# Altium PCB Copy of main - shifted.PcbDoc (part 8 of 15)
Units mil, origin at the board's own origin, x right, y up, seen from the top; angles counter-clockwise.
Board outline 8394.55 x 5164.44 mil, 7 copper layers (Top Layer 1, Layer 2, Layer 3, Unused, Layer 4_pow, Layer 5_gnd, Bottom 6+gnd), stack 46.112 mil thick; 363 components, 409 nets, 1750 pads, 991 vias.
Unrouted connection lines stored in the file: 111.
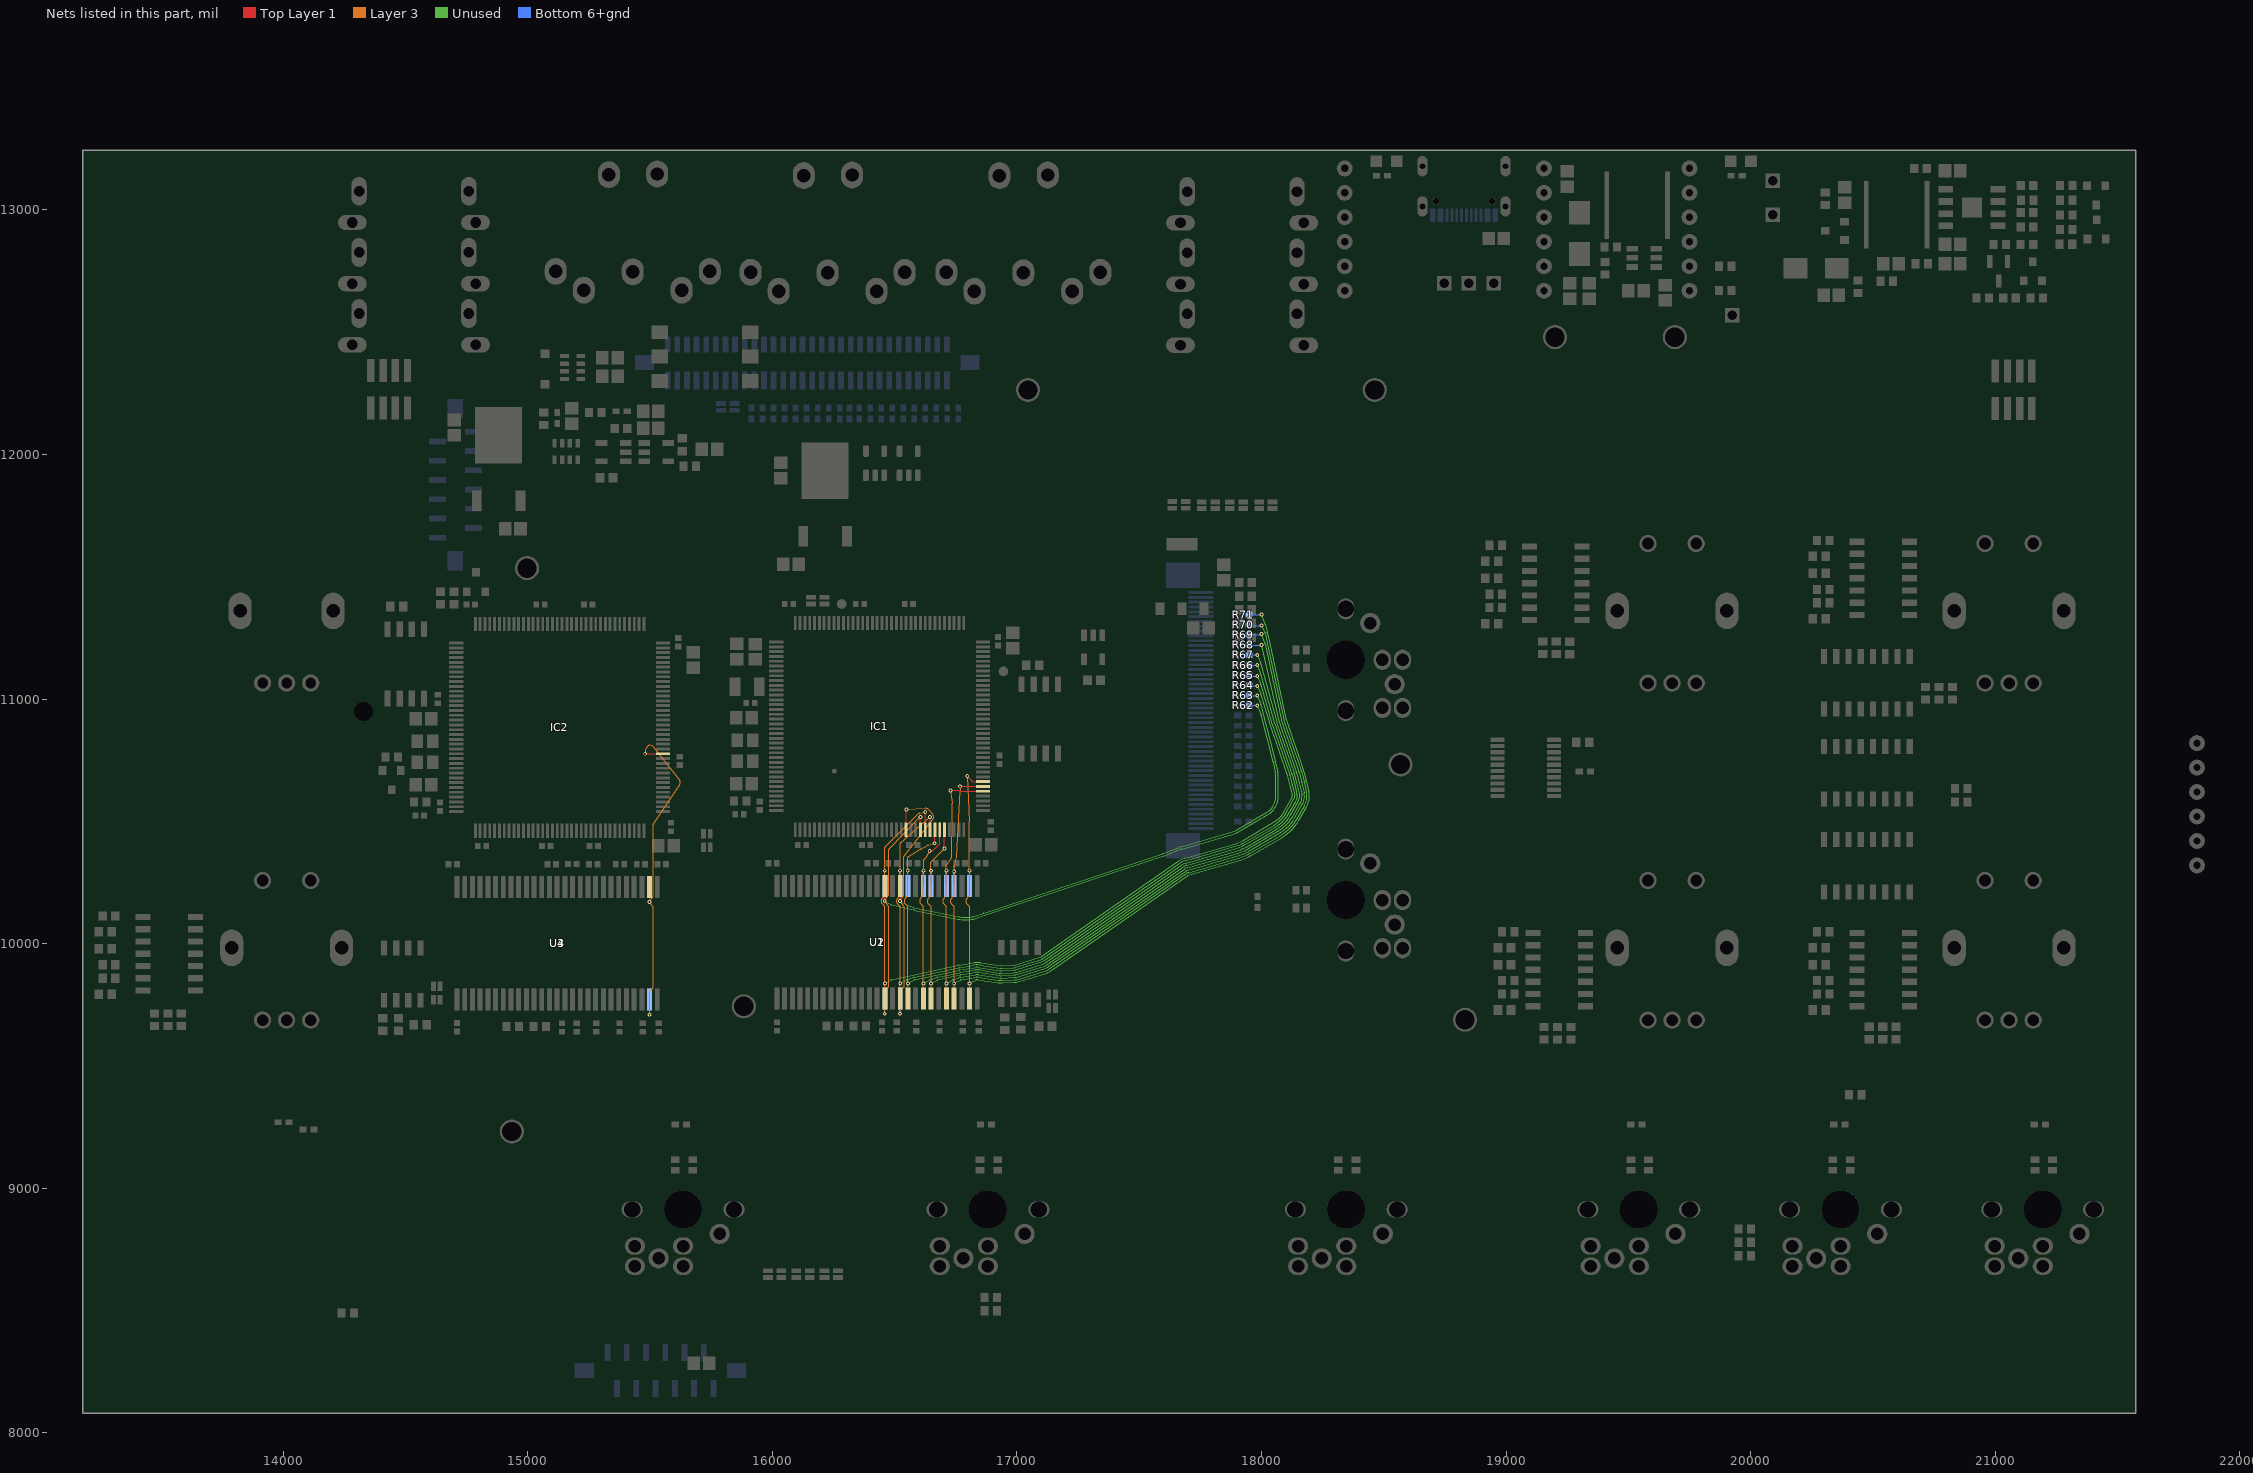
[diagram p11: the nets of this part, all layers, seen from the top]

## Via types
v1: diameter 15.75, hole 7.87, Top Layer 1 to Bottom 6+gnd, tented both sides, 923 vias
v2: diameter 27.56, hole 11.81, Top Layer 1 to Bottom 6+gnd, 45 vias
v3: diameter 23.62/23.62/23.62/23.62/23.62/23.62/23.62 (per signal layer), hole 12, Top Layer 1 to Bottom 6+gnd, tented top, 10 vias
v4: diameter 15.75, hole 7.87, Top Layer 1 to Bottom 6+gnd, 10 vias
v5: diameter 23.62/23.62/23.62/23.62/23.62/23.62/23.62 (per signal layer), hole 12, Top Layer 1 to Bottom 6+gnd, tented bottom, 3 vias

## Nets (pads, with @x,y where several pads share a name; then routed paths per layer and width w, separated by ;. In a path a pad name is that pad's centre, name@x,y a point inside that pad or via, vN(x,y) a via of type N, cw(c..) or ccw(c..) an arc to the next point about the centre after c; other vN are vias at no path point) (continued)
D6: IC1.60 R62.2 U1.11 U2.11 | length 3636.5
  Top Layer 1 w5: v1(16522.39,10174.13) 16522.39,10193.72 U1.11@16522.64,10236.22 ; IC1.60@16546.58,10465.91 16547.28,10466.61 16547.28,10547.95 v1(16548.15,10548.82)
  Unused w5: v1(16522.39,10174.13) 16523.97,10172.64 ccw(c16527.39,10176.28) 16525.08,10171.85 16546.76,10160.51 ccw(c16553.89,10174.13) 16548.12,10159.88 16576.19,10148.61 ccw(c16585.65,10172.15) 16580.53,10147.3 16761.18,10110.1 ccw(c16774.36,10174.13) 16774.36,10108.76 16805.86,10108.76 ccw(c16805.86,10174.13) 16827.38,10112.4 16862.9,10124.76 cw(c16871.26,10100.81) 16863.28,10124.89 17596.76,10367.97 ccw(c17573.21,10439.17) 17600.79,10369.43 17658.78,10392.32 cw(c17710.04,10262.58) 17671.27,10396.58 17879.91,10456.95 ccw(c17859.4,10529.09) 17897.19,10464.3 18021.56,10536.89 ccw(c17983.57,10601.98) 18058.94,10601.98 18058.94,10681.98 ccw(c17983.57,10681.98) 18057.05,10698.76 18047.32,10741.43 ccw(c17983.57,10726.98) 18046.89,10743.24 17997.35,10936.27 ccw(c17982.46,10932.45) 17996.74,10938.14 v1(17982.46,10974.03)
  Layer 3 w5: v1(16522.39,9713.5) 16522.39,9805.11 cw(c16527.39,9805.12) 16523.84,9808.63 16537.06,9821.89 ; v1(16548.15,10548.82) 16624.21,10553.92 ; 16537.06,9821.89 ccw(c16533.51,9825.42) 16538.51,9825.33 ; 16537.06,9821.89 ccw(c16533.51,9825.42) 16538.51,9825.33 ; 16537.06,9821.89 ccw(c16533.51,9825.42) 16538.51,9825.33 ; 16537.06,9821.89 ccw(c16533.51,9825.42) 16538.51,9825.33 ; 16537.06,9821.89 ccw(c16533.51,9825.42) 16538.51,9825.33 ; 16537.06,9821.89 ccw(c16533.51,9825.42) 16538.51,9825.33 ; 16537.06,9821.89 ccw(c16533.51,9825.42) 16538.51,9825.33 ; 16537.06,9821.89 ccw(c16533.51,9825.42) 16538.51,9825.33 ; 16537.06,9821.89 ccw(c16533.51,9825.42) 16538.51,9825.33 ; 16537.06,9821.89 ccw(c16533.51,9825.42) 16538.51,9825.33 ; 16537.06,9821.89 ccw(c16533.51,9825.42) 16538.51,9825.33 ; 16537.06,9821.89 ccw(c16533.51,9825.42) 16538.51,9825.33 ; 16537.06,9821.89 ccw(c16533.51,9825.42) 16538.51,9825.33 ; 16537.06,9821.89 ccw(c16533.51,9825.42) 16538.51,9825.33 ; 16537.06,9821.89 ccw(c16533.51,9825.42) 16538.51,9825.33 ; 16537.06,9821.89 ccw(c16533.51,9825.42) 16538.51,9825.33 ; 16537.46,10152.99 cw(c16533.51,10149.93) 16538.51,10150.02 ; 16537.46,10152.99 cw(c16533.51,10149.93) 16538.51,10150.02 ; 16537.46,10152.99 cw(c16533.51,10149.93) 16538.51,10150.02 ; 16537.46,10152.99 cw(c16533.51,10149.93) 16538.51,10150.02 ; 16537.46,10152.99 cw(c16533.51,10149.93) 16538.51,10150.02 ; 16537.46,10152.99 cw(c16533.51,10149.93) 16538.51,10150.02 ; 16537.46,10152.99 cw(c16533.51,10149.93) 16538.51,10150.02 ; 16537.46,10152.99 cw(c16533.51,10149.93) 16538.51,10150.02 ; 16537.46,10152.99 cw(c16533.51,10149.93) 16538.51,10150.02 ; 16537.46,10152.99 cw(c16533.51,10149.93) 16538.51,10150.02 ; 16537.46,10152.99 cw(c16533.51,10149.93) 16538.51,10150.02 ; 16537.46,10152.99 cw(c16533.51,10149.93) 16538.51,10150.02 ; 16537.46,10152.99 cw(c16533.51,10149.93) 16538.51,10150.02 ; 16537.46,10152.99 cw(c16533.51,10149.93) 16538.51,10150.02 ; 16537.46,10152.99 cw(c16533.51,10149.93) 16538.51,10150.02 ; 16537.46,10152.99 cw(c16533.51,10149.93) 16538.51,10150.02 ; 16537.47,10152.99 16523.44,10171.06 cw(c16527.39,10174.13) v1(16522.39,10174.13) 16522.39,10174.19 cw(c16527.39,10174.13) 16523.21,10176.88 16536.95,10197.79 ccw(c16532.77,10200.53) 16537.77,10200.44 16537.77,10356.36 ; 16537.77,10356.36 cw(c16542.77,10356.36) 16538.84,10359.46 ; 16537.77,10356.36 cw(c16542.77,10356.36) 16538.84,10359.46 ; 16537.77,10356.36 cw(c16542.77,10356.36) 16538.84,10359.46 ; 16537.77,10356.36 cw(c16542.77,10356.36) 16538.84,10359.46 ; 16537.77,10356.36 cw(c16542.77,10356.36) 16538.84,10359.46 ; 16537.77,10356.36 cw(c16542.77,10356.36) 16538.84,10359.46 ; 16537.77,10356.36 cw(c16542.77,10356.36) 16538.84,10359.46 ; 16537.77,10356.36 cw(c16542.77,10356.36) 16538.84,10359.46 ; 16537.77,10356.36 cw(c16542.77,10356.36) 16538.84,10359.46 ; 16537.77,10356.36 cw(c16542.77,10356.36) 16538.84,10359.46 ; 16537.77,10356.36 cw(c16542.77,10356.36) 16538.84,10359.46 ; 16537.77,10356.36 cw(c16542.77,10356.36) 16538.84,10359.46 ; 16537.77,10356.36 cw(c16542.77,10356.36) 16538.84,10359.46 ; 16537.77,10356.36 cw(c16542.77,10356.36) 16538.84,10359.46 ; 16537.77,10356.36 cw(c16542.77,10356.36) 16538.84,10359.46 ; 16537.77,10356.36 cw(c16542.77,10356.36) 16538.84,10359.46 ; 16538.51,9825.33 16538.51,10150.02 ; 16538.84,10359.46 16656.68,10509.07 ccw(c16644.61,10518.58) 16655.65,10529.28 16636.28,10549.28 ; 16624.21,10553.92 cw(c16625.24,10538.58) 16636.28,10549.28 ; 16624.21,10553.92 cw(c16625.24,10538.58) 16636.28,10549.28 ; 16624.21,10553.92 cw(c16625.24,10538.58) 16636.28,10549.28 ; 16624.21,10553.92 cw(c16625.24,10538.58) 16636.28,10549.28 ; 16624.21,10553.92 cw(c16625.24,10538.58) 16636.28,10549.28 ; 16624.21,10553.92 cw(c16625.24,10538.58) 16636.28,10549.28 ; 16624.21,10553.92 cw(c16625.24,10538.58) 16636.28,10549.28 ; 16624.21,10553.92 cw(c16625.24,10538.58) 16636.28,10549.28 ; 16624.21,10553.92 cw(c16625.24,10538.58) 16636.28,10549.28 ; 16624.21,10553.92 cw(c16625.24,10538.58) 16636.28,10549.28 ; 16624.21,10553.92 cw(c16625.24,10538.58) 16636.28,10549.28 ; 16624.21,10553.92 cw(c16625.24,10538.58) 16636.28,10549.28 ; 16624.21,10553.92 cw(c16625.24,10538.58) 16636.28,10549.28 ; 16624.21,10553.92 cw(c16625.24,10538.58) 16636.28,10549.28 ; 16624.21,10553.92 cw(c16625.24,10538.58) 16636.28,10549.28 ; 16624.21,10553.92 cw(c16625.24,10538.58) 16636.28,10549.28
  Bottom 6+gnd w5: v1@16522.64,9713.75 U2.11@16522.64,9775.59 ; R62.2@17948.43,10974.03 v1(17982.46,10974.03)
D7: IC1.63 R63.2 U1.13 U2.13 | length 3429.1
  Top Layer 1 w5: v1(16459.4,10174.13) 16459.4,10193.72 U1.13@16459.65,10236.22 ; IC1.63@16605.47,10466.06 v1@16605.47,10518.35
  Unused w5: v1(16459.4,10174.13) 16460.89,10172.65 ccw(c16464.4,10176.21) 16462.09,10171.77 16483.85,10160.47 ccw(c16490.9,10174.13) 16487.34,10159.18 16577.53,10137.72 16578.47,10137.51 ccw(c16580.53,10147.3) 16578.56,10137.5 16759.18,10100.3 ccw(c16774.36,10174.13) 16774.36,10098.76 16805.86,10098.76 ccw(c16805.86,10174.13) 16830.63,10102.95 16866.18,10115.32 cw(c16871.26,10100.81) 16866.43,10115.4 17599.95,10358.49 ccw(c17573.21,10439.17) 17604.41,10360.11 17662.5,10383.04 cw(c17710.04,10262.58) 17674.07,10386.98 17882.69,10447.34 ccw(c17859.4,10529.09) 17902.23,10455.67 18026.6,10528.25 ccw(c17983.57,10601.98) 18068.94,10601.98 18068.94,10681.98 ccw(c17983.57,10681.98) 18066.8,10700.98 18057.07,10743.66 ccw(c17983.57,10726.98) 18056.56,10745.76 17997.36,10977.83 ccw(c17982.46,10974.03) 17996.65,10979.94 v1(17982.46,11014.03)
  Layer 3 w5: v1(16459.4,9713.5) 16459.4,9805.11 cw(c16464.4,9805.12) 16460.85,9808.63 16473.81,9821.64 ; v1(16605.24,10518.58) 16476.2,10386.87 ; v1(16459.4,10174.13) ccw(c16464.4,10174.13) v1@16460.43,10171.1 ; v1(16459.4,10174.13) ccw(c16464.4,10174.13) v1@16460.43,10171.1 ; v1(16459.4,10174.13) ccw(c16464.4,10174.13) v1@16460.43,10171.1 ; v1(16459.4,10174.13) ccw(c16464.4,10174.13) v1@16460.43,10171.1 ; v1(16459.4,10174.13) ccw(c16464.4,10174.13) v1@16460.43,10171.09 ; v1(16459.4,10174.13) 16459.4,10174.19 cw(c16464.4,10174.13) 16460.22,10176.88 16473.95,10197.79 ccw(c16469.77,10200.53) 16474.77,10200.44 16474.77,10383.37 ; v1@16460.43,10171.09 16474.22,10153.24 ; 16473.81,9821.64 ccw(c16470.26,9825.17) 16475.26,9825.08 ; 16473.81,9821.64 ccw(c16470.26,9825.17) 16475.26,9825.08 ; 16473.81,9821.64 ccw(c16470.26,9825.17) 16475.26,9825.08 ; 16473.81,9821.64 ccw(c16470.26,9825.17) 16475.26,9825.08 ; 16473.81,9821.64 ccw(c16470.26,9825.17) 16475.26,9825.08 ; 16473.81,9821.64 ccw(c16470.26,9825.17) 16475.26,9825.08 ; 16473.81,9821.64 ccw(c16470.26,9825.17) 16475.26,9825.08 ; 16473.81,9821.64 ccw(c16470.26,9825.17) 16475.26,9825.08 ; 16473.81,9821.64 ccw(c16470.26,9825.17) 16475.26,9825.08 ; 16473.81,9821.64 ccw(c16470.26,9825.17) 16475.26,9825.08 ; 16473.81,9821.64 ccw(c16470.26,9825.17) 16475.26,9825.08 ; 16473.81,9821.64 ccw(c16470.26,9825.17) 16475.26,9825.08 ; 16473.81,9821.64 ccw(c16470.26,9825.17) 16475.26,9825.08 ; 16473.81,9821.64 ccw(c16470.26,9825.17) 16475.26,9825.08 ; 16473.81,9821.64 ccw(c16470.26,9825.17) 16475.26,9825.08 ; 16473.81,9821.64 ccw(c16470.26,9825.17) 16475.26,9825.08 ; 16474.22,10153.24 cw(c16470.26,10150.19) 16475.26,10150.28 ; 16474.22,10153.24 cw(c16470.26,10150.19) 16475.26,10150.28 ; 16474.22,10153.24 cw(c16470.26,10150.19) 16475.26,10150.28 ; 16474.22,10153.24 cw(c16470.26,10150.19) 16475.26,10150.28 ; 16474.22,10153.24 cw(c16470.26,10150.19) 16475.26,10150.28 ; 16474.22,10153.24 cw(c16470.26,10150.19) 16475.26,10150.28 ; 16474.22,10153.24 cw(c16470.26,10150.19) 16475.26,10150.28 ; 16474.22,10153.24 cw(c16470.26,10150.19) 16475.26,10150.28 ; 16474.22,10153.24 cw(c16470.26,10150.19) 16475.26,10150.28 ; 16474.22,10153.24 cw(c16470.26,10150.19) 16475.26,10150.28 ; 16474.22,10153.24 cw(c16470.26,10150.19) 16475.26,10150.28 ; 16474.22,10153.24 cw(c16470.26,10150.19) 16475.26,10150.28 ; 16474.22,10153.24 cw(c16470.26,10150.19) 16475.26,10150.28 ; 16474.22,10153.24 cw(c16470.26,10150.19) 16475.26,10150.28 ; 16474.22,10153.24 cw(c16470.26,10150.19) 16475.26,10150.28 ; 16474.22,10153.24 cw(c16470.26,10150.19) 16475.26,10150.28 ; 16474.77,10383.37 cw(c16479.77,10383.37) 16476.2,10386.87 ; 16474.77,10383.37 cw(c16479.77,10383.37) 16476.19,10386.86 ; 16474.77,10383.37 cw(c16479.77,10383.37) 16476.19,10386.86 ; 16474.77,10383.37 cw(c16479.77,10383.37) 16476.19,10386.86 ; 16474.77,10383.37 cw(c16479.77,10383.37) 16476.19,10386.86 ; 16474.77,10383.37 cw(c16479.77,10383.37) 16476.19,10386.86 ; 16474.77,10383.37 cw(c16479.77,10383.37) 16476.19,10386.86 ; 16474.77,10383.37 cw(c16479.77,10383.37) 16476.19,10386.86 ; 16474.77,10383.37 cw(c16479.77,10383.37) 16476.19,10386.85 ; 16474.77,10383.37 cw(c16479.77,10383.37) 16476.19,10386.85 ; 16474.77,10383.37 cw(c16479.77,10383.37) 16476.19,10386.85 ; 16474.77,10383.37 cw(c16479.77,10383.37) 16476.19,10386.85 ; 16474.77,10383.37 cw(c16479.77,10383.37) 16476.19,10386.85 ; 16474.77,10383.37 cw(c16479.77,10383.37) 16476.19,10386.85 ; 16474.77,10383.37 cw(c16479.77,10383.37) 16476.19,10386.85 ; 16474.77,10383.37 cw(c16479.77,10383.37) 16476.19,10386.85 ; 16475.26,9825.08 16475.26,10150.28
  Bottom 6+gnd w5: v1@16459.65,9713.75 U2.13@16459.65,9775.59 ; R63.2@17947.32,11014.23 17982.25,11014.23 v1(17982.46,11014.03)
D8: IC1.64 R64.2 U1.42 U2.42 | length 3696.2
  Top Layer 1 w5: U1.42@16459.65,9775.59 16459.89,9818.09 v1(16459.89,9837.68) ; IC1.64@16625.32,10465.9 v1@16625.32,10538.5
  Unused w5: v1(16459.89,9837.68) 16461.36,9839.14 cw(c16464.89,9835.6) 16462.59,9840.04 16484.28,9851.31 cw(c16491.39,9837.68) 16488.13,9852.7 16758.92,9911.35 cw(c16774.85,9837.68) 16762.89,9912.09 16824.29,9921.97 cw(c16837.84,9837.68) 16851.02,9922.03 16932.76,9909.48 ccw(c16935.11,9924.67) 16935.89,9909.31 16986.05,9911.85 ccw(c16985.24,9927.2) 16989.79,9912.52 17100.25,9946.79 ccw(c17098.03,9953.96) 17102.32,9947.81 17658.84,10335.99 cw(c17710.04,10262.58) 17685.17,10348.55 17893.88,10408.94 ccw(c17859.4,10529.09) 17922.28,10421.05 18046.76,10493.7 ccw(c17983.57,10601.98) 18092.29,10539.56 18123.88,10594.57 ccw(c18110.55,10602.23) 18125.49,10605.83 18115.75,10646.2 ccw(c18100.81,10642.59) 18115.68,10646.47 18105.48,10685.68 ccw(c18090.6,10681.8) 18105.07,10686.99 18034.86,10892.03 cw(c18141.73,10928.53) 18033.48,10896.35 17997.19,11018.41 ccw(c17982.46,11014.03) 17996.65,11019.94 v1(17982.46,11054.03)
  Layer 3 w5: v1(16459.89,9837.68) 16459.89,10149.87 ; v1(16625.24,10538.58) 16602.02,10533.62 ; 16458.43,10153.31 cw(c16454.89,10149.78) 16459.89,10149.87 ; 16458.43,10153.31 cw(c16454.89,10149.78) 16459.89,10149.87 ; 16458.43,10153.31 cw(c16454.89,10149.78) 16459.89,10149.87 ; 16458.43,10153.31 cw(c16454.89,10149.78) 16459.89,10149.87 ; 16458.43,10153.31 cw(c16454.89,10149.78) 16459.89,10149.87 ; 16458.43,10153.31 cw(c16454.89,10149.78) 16459.89,10149.87 ; 16458.43,10153.31 cw(c16454.89,10149.78) 16459.89,10149.87 ; 16458.43,10153.31 cw(c16454.89,10149.78) 16459.89,10149.87 ; 16458.43,10153.31 cw(c16454.89,10149.78) 16459.89,10149.87 ; 16458.43,10153.31 cw(c16454.89,10149.78) 16459.89,10149.87 ; 16458.43,10153.31 cw(c16454.89,10149.78) 16459.89,10149.87 ; 16458.43,10153.31 cw(c16454.89,10149.78) 16459.89,10149.87 ; 16458.43,10153.31 cw(c16454.89,10149.78) 16459.89,10149.87 ; 16458.43,10153.31 cw(c16454.89,10149.78) 16459.89,10149.87 ; 16458.43,10153.31 cw(c16454.89,10149.78) 16459.89,10149.87 ; 16458.43,10153.31 cw(c16454.89,10149.78) 16459.89,10149.87 ; 16458.43,10153.31 16448.51,10163.28 cw(c16459.4,10174.13) 16447.88,10184.31 16458.64,10196.48 ; 16458.64,10196.48 ccw(c16454.89,10199.79) 16459.89,10199.7 ; 16458.64,10196.48 ccw(c16454.89,10199.79) 16459.89,10199.7 ; 16458.64,10196.48 ccw(c16454.89,10199.79) 16459.89,10199.7 ; 16458.64,10196.48 ccw(c16454.89,10199.79) 16459.89,10199.7 ; 16458.64,10196.48 ccw(c16454.89,10199.79) 16459.89,10199.7 ; 16458.64,10196.48 ccw(c16454.89,10199.79) 16459.89,10199.7 ; 16458.64,10196.48 ccw(c16454.89,10199.79) 16459.89,10199.7 ; 16458.64,10196.48 ccw(c16454.89,10199.79) 16459.89,10199.7 ; 16458.64,10196.48 ccw(c16454.89,10199.79) 16459.89,10199.7 ; 16458.64,10196.48 ccw(c16454.89,10199.79) 16459.89,10199.7 ; 16458.64,10196.48 ccw(c16454.89,10199.79) 16459.89,10199.7 ; 16458.64,10196.48 ccw(c16454.89,10199.79) 16459.89,10199.7 ; 16458.64,10196.48 ccw(c16454.89,10199.79) 16459.89,10199.7 ; 16458.64,10196.48 ccw(c16454.89,10199.79) 16459.89,10199.7 ; 16458.64,10196.48 ccw(c16454.89,10199.79) 16459.89,10199.7 ; 16458.64,10196.48 ccw(c16454.89,10199.79) 16459.89,10199.7 ; 16459.4,10392.42 cw(c16464.4,10392.42) 16460.85,10395.93 ; 16459.4,10392.42 cw(c16464.4,10392.42) 16460.85,10395.93 ; 16459.4,10392.42 cw(c16464.4,10392.42) 16460.85,10395.93 ; 16459.4,10392.42 cw(c16464.4,10392.42) 16460.85,10395.93 ; 16459.4,10392.42 cw(c16464.4,10392.42) 16460.85,10395.93 ; 16459.4,10392.42 cw(c16464.4,10392.42) 16460.85,10395.93 ; 16459.4,10392.42 cw(c16464.4,10392.42) 16460.85,10395.93 ; 16459.4,10392.42 cw(c16464.4,10392.42) 16460.85,10395.93 ; 16459.4,10392.42 cw(c16464.4,10392.42) 16460.85,10395.93 ; 16459.4,10392.42 cw(c16464.4,10392.42) 16460.85,10395.93 ; 16459.4,10392.42 cw(c16464.4,10392.42) 16460.85,10395.93 ; 16459.4,10392.42 cw(c16464.4,10392.42) 16460.85,10395.93 ; 16459.4,10392.42 cw(c16464.4,10392.42) 16460.85,10395.93 ; 16459.4,10392.42 cw(c16464.4,10392.42) 16460.85,10395.93 ; 16459.4,10392.42 cw(c16464.4,10392.42) 16460.85,10395.93 ; 16459.4,10392.42 cw(c16464.4,10392.42) 16460.85,10395.93 ; 16459.4,10392.42 v1(16459.4,10298.31) 16459.89,10297.82 16459.89,10199.7 ; 16460.85,10395.93 16594.38,10529.47 ; 16594.38,10529.47 cw(c16605.24,10518.58) 16602.02,10533.62 ; 16594.38,10529.47 cw(c16605.24,10518.58) 16602.02,10533.62 ; 16594.38,10529.47 cw(c16605.24,10518.58) 16602.02,10533.62 ; 16594.38,10529.47 cw(c16605.24,10518.58) 16602.02,10533.62 ; 16594.38,10529.47 cw(c16605.24,10518.58) 16602.02,10533.62 ; 16594.38,10529.47 cw(c16605.24,10518.58) 16602.02,10533.62 ; 16594.38,10529.47 cw(c16605.24,10518.58) 16602.02,10533.62 ; 16594.38,10529.47 cw(c16605.24,10518.58) 16602.02,10533.62 ; 16594.38,10529.47 cw(c16605.24,10518.58) 16602.02,10533.62 ; 16594.38,10529.47 cw(c16605.24,10518.58) 16602.02,10533.62 ; 16594.38,10529.47 cw(c16605.24,10518.58) 16602.02,10533.62 ; 16594.38,10529.47 cw(c16605.24,10518.58) 16602.02,10533.62 ; 16594.38,10529.47 cw(c16605.24,10518.58) 16602.02,10533.62 ; 16594.38,10529.47 cw(c16605.24,10518.58) 16602.02,10533.62 ; 16594.38,10529.47 cw(c16605.24,10518.58) 16602.02,10533.62 ; 16594.38,10529.47 cw(c16605.24,10518.58) 16602.02,10533.62
  Bottom 6+gnd w5: U2.42@16459.65,10236.22 v1@16459.65,10298.06 ; R64.2@17947.32,11055.55 17980.94,11055.55 v1(17982.46,11054.03)
D9: IC1.65 R65.2 U1.44 U2.44 | length 3497.6
  Top Layer 1 w5: U1.44@16522.64,9775.59 16522.88,9818.09 v1(16522.88,9837.68) ; IC1.65@16644.84,10466.06 v1@16644.84,10518.35
  Unused w5: v1(16522.88,9837.68) 16524.35,9839.14 cw(c16527.88,9835.6) 16525.58,9840.04 16547.27,9851.31 cw(c16554.38,9837.68) 16549.5,9852.25 16577.84,9861.75 cw(c16585.87,9837.68) 16580.55,9862.48 16761.07,9901.58 cw(c16774.85,9837.68) 16764.46,9902.22 16825.85,9912.09 cw(c16837.84,9837.68) 16849.47,9912.15 16931.17,9899.6 ccw(c16935.11,9924.67) 16936.43,9899.33 16986.51,9901.86 ccw(c16985.24,9927.2) 16992.72,9902.96 17103.22,9937.24 ccw(c17098.03,9953.96) 17108.04,9939.6 17664.48,10327.73 cw(c17710.04,10262.58) 17688,10338.96 17896.69,10399.34 ccw(c17859.4,10529.09) 17927.32,10412.42 18051.8,10485.06 ccw(c17983.57,10601.98) 18100.97,10534.58 18132.55,10589.59 ccw(c18110.55,10602.23) 18135.22,10608.18 18125.47,10648.55 ccw(c18100.81,10642.59) 18125.36,10648.99 18115.15,10688.19 ccw(c18090.6,10681.8) 18114.53,10690.23 18044.33,10895.24 cw(c18141.73,10928.53) 18042.82,10900.04 17997.23,11058.29 ccw(c17982.46,11054.03) 17996.65,11059.94 v1(17982.46,11094.03)
  Layer 3 w5: v1(16522.88,9837.68) 16522.88,10149.87 ; v1(16644.61,10518.58) 16524.08,10412.23 ; 16521.43,10153.31 cw(c16517.88,10149.78) 16522.88,10149.87 ; 16521.43,10153.31 cw(c16517.88,10149.78) 16522.88,10149.87 ; 16521.43,10153.31 cw(c16517.88,10149.78) 16522.88,10149.87 ; 16521.43,10153.31 cw(c16517.88,10149.78) 16522.88,10149.87 ; 16521.43,10153.31 cw(c16517.88,10149.78) 16522.88,10149.87 ; 16521.43,10153.31 cw(c16517.88,10149.78) 16522.88,10149.87 ; 16521.43,10153.31 cw(c16517.88,10149.78) 16522.88,10149.87 ; 16521.43,10153.31 cw(c16517.88,10149.78) 16522.88,10149.87 ; 16521.43,10153.31 cw(c16517.88,10149.78) 16522.88,10149.87 ; 16521.43,10153.31 cw(c16517.88,10149.78) 16522.88,10149.87 ; 16521.43,10153.31 cw(c16517.88,10149.78) 16522.88,10149.87 ; 16521.43,10153.31 cw(c16517.88,10149.78) 16522.88,10149.87 ; 16521.43,10153.31 cw(c16517.88,10149.78) 16522.88,10149.87 ; 16521.43,10153.31 cw(c16517.88,10149.78) 16522.88,10149.87 ; 16521.43,10153.31 cw(c16517.88,10149.78) 16522.88,10149.87 ; 16521.43,10153.31 cw(c16517.88,10149.78) 16522.88,10149.87 ; 16521.43,10153.31 16511.5,10163.28 cw(c16522.39,10174.13) 16510.87,10184.31 16521.63,10196.48 ; 16521.63,10196.48 ccw(c16517.88,10199.79) 16522.88,10199.7 ; 16521.63,10196.48 ccw(c16517.88,10199.79) 16522.88,10199.7 ; 16521.63,10196.48 ccw(c16517.88,10199.79) 16522.88,10199.7 ; 16521.63,10196.48 ccw(c16517.88,10199.79) 16522.88,10199.7 ; 16521.63,10196.48 ccw(c16517.88,10199.79) 16522.88,10199.7 ; 16521.63,10196.48 ccw(c16517.88,10199.79) 16522.88,10199.7 ; 16521.63,10196.48 ccw(c16517.88,10199.79) 16522.88,10199.7 ; 16521.63,10196.48 ccw(c16517.88,10199.79) 16522.88,10199.7 ; 16521.63,10196.48 ccw(c16517.88,10199.79) 16522.88,10199.7 ; 16521.63,10196.48 ccw(c16517.88,10199.79) 16522.88,10199.7 ; 16521.63,10196.48 ccw(c16517.88,10199.79) 16522.88,10199.7 ; 16521.63,10196.48 ccw(c16517.88,10199.79) 16522.88,10199.7 ; 16521.63,10196.48 ccw(c16517.88,10199.79) 16522.88,10199.7 ; 16521.63,10196.48 ccw(c16517.88,10199.79) 16522.88,10199.7 ; 16521.63,10196.48 ccw(c16517.88,10199.79) 16522.88,10199.7 ; 16521.63,10196.48 ccw(c16517.88,10199.79) 16522.88,10199.7 ; 16522.39,10408.49 cw(c16527.39,10408.49) 16524.08,10412.24 ; 16522.39,10408.49 cw(c16527.39,10408.49) 16524.08,10412.24 ; 16522.39,10408.49 cw(c16527.39,10408.49) 16524.08,10412.24 ; 16522.39,10408.49 cw(c16527.39,10408.49) 16524.08,10412.24 ; 16522.39,10408.49 cw(c16527.39,10408.49) 16524.08,10412.24 ; 16522.39,10408.49 cw(c16527.39,10408.49) 16524.08,10412.24 ; 16522.39,10408.49 cw(c16527.39,10408.49) 16524.08,10412.24 ; 16522.39,10408.49 cw(c16527.39,10408.49) 16524.08,10412.24 ; 16522.39,10408.49 cw(c16527.39,10408.49) 16524.08,10412.24 ; 16522.39,10408.49 cw(c16527.39,10408.49) 16524.08,10412.24 ; 16522.39,10408.49 cw(c16527.39,10408.49) 16524.08,10412.24 ; 16522.39,10408.49 cw(c16527.39,10408.49) 16524.08,10412.24 ; 16522.39,10408.49 cw(c16527.39,10408.49) 16524.08,10412.24 ; 16522.39,10408.49 cw(c16527.39,10408.49) 16524.08,10412.24 ; 16522.39,10408.49 cw(c16527.39,10408.49) 16524.08,10412.24 ; 16522.39,10408.49 cw(c16527.39,10408.49) 16524.08,10412.24 ; 16522.39,10408.49 v1(16522.39,10298.31) 16522.88,10297.82 16522.88,10199.7
  Bottom 6+gnd w5: U2.44@16522.64,10236.22 v1@16522.64,10298.06 ; R65.2@17947.32,11096.87 17948.15,11096.69 17960.69,11094.03 v1(17982.46,11094.03)
D10: IC1.66 R66.2 U1.45 U2.45 | length 3395.8
  Top Layer 1 w5: U1.45@16554.13,9775.59 16554.38,9818.09 v1(16554.38,9837.68) ; v1(16663.51,10410.52) 16664.42,10411.44 IC1.66@16664.42,10466.15
  Unused w5: v1(16554.38,9837.68) 16555.85,9839.14 cw(c16559.38,9835.6) 16557.07,9840.04 16578.77,9851.31 cw(c16585.87,9837.68) 16582.62,9852.7 16763.13,9891.8 cw(c16774.85,9837.68) 16766.04,9892.35 16827.44,9902.22 cw(c16837.84,9837.68) 16847.68,9902.31 16929.65,9889.72 ccw(c16935.11,9924.67) 16936.94,9889.34 16987.02,9891.88 ccw(c16985.24,9927.2) 16995.73,9893.42 17106.18,9927.69 ccw(c17098.03,9953.96) 17113.78,9931.41 17670.18,10319.51 cw(c17710.04,10262.58) 17690.73,10329.34 17899.51,10389.75 ccw(c17859.4,10529.09) 17932.36,10403.78 18056.84,10476.43 ccw(c17983.57,10601.98) 18109.64,10529.6 18141.23,10584.61 ccw(c18110.55,10602.23) 18144.94,10610.53 18135.19,10650.89 ccw(c18100.81,10642.59) 18135.05,10651.46 18124.84,10690.67 ccw(c18090.6,10681.8) 18124,10693.46 18053.78,10898.5 cw(c18141.73,10928.53) 18052.29,10903.28 17997.25,11098.21 ccw(c17982.46,11094.03) 17996.91,11099.28 v1(17982.46,11139.03)
  Layer 3 w5: v1(16554.38,9837.68) 16554.38,10149.87 ; v1(16663.51,10410.52) 16636.6,10403.33 ccw(c16643.15,10378.82) 16630.48,10400.81 16605.64,10386.49 ccw(c16618.3,10364.5) 16605.11,10386.18 16555.55,10356.02 ; 16552.92,10153.31 cw(c16549.38,10149.78) 16554.38,10149.87 ; 16552.92,10153.31 cw(c16549.38,10149.78) 16554.38,10149.87 ; 16552.92,10153.31 cw(c16549.38,10149.78) 16554.38,10149.87 ; 16552.92,10153.31 cw(c16549.38,10149.78) 16554.38,10149.87 ; 16552.92,10153.31 cw(c16549.38,10149.78) 16554.38,10149.87 ; 16552.92,10153.31 cw(c16549.38,10149.78) 16554.38,10149.87 ; 16552.92,10153.31 cw(c16549.38,10149.78) 16554.38,10149.87 ; 16552.92,10153.31 cw(c16549.38,10149.78) 16554.38,10149.87 ; 16552.92,10153.31 cw(c16549.38,10149.78) 16554.38,10149.87 ; 16552.92,10153.31 cw(c16549.38,10149.78) 16554.38,10149.87 ; 16552.92,10153.31 cw(c16549.38,10149.78) 16554.38,10149.87 ; 16552.92,10153.31 cw(c16549.38,10149.78) 16554.38,10149.87 ; 16552.92,10153.31 cw(c16549.38,10149.78) 16554.38,10149.87 ; 16552.92,10153.31 cw(c16549.38,10149.78) 16554.38,10149.87 ; 16552.92,10153.31 cw(c16549.38,10149.78) 16554.38,10149.87 ; 16552.92,10153.31 cw(c16549.38,10149.78) 16554.38,10149.87 ; 16552.92,10153.31 16542.99,10163.28 cw(c16553.89,10174.13) 16542.29,10184.22 16551.92,10195.28 ccw(c16548.15,10198.56) 16553.15,10198.47 v1(16553.15,10298.82) 16553.15,10351.75 ; 16553.15,10351.75 cw(c16558.15,10351.75) 16555.55,10356.02 ; 16553.15,10351.75 cw(c16558.15,10351.75) 16555.55,10356.02 ; 16553.15,10351.75 cw(c16558.15,10351.75) 16555.55,10356.02 ; 16553.15,10351.75 cw(c16558.15,10351.75) 16555.55,10356.02 ; 16553.15,10351.75 cw(c16558.15,10351.75) 16555.55,10356.02 ; 16553.15,10351.75 cw(c16558.15,10351.75) 16555.55,10356.02 ; 16553.15,10351.75 cw(c16558.15,10351.75) 16555.55,10356.02 ; 16553.15,10351.75 cw(c16558.15,10351.75) 16555.55,10356.02 ; 16553.15,10351.75 cw(c16558.15,10351.75) 16555.55,10356.02 ; 16553.15,10351.75 cw(c16558.15,10351.75) 16555.55,10356.02 ; 16553.15,10351.75 cw(c16558.15,10351.75) 16555.55,10356.02 ; 16553.15,10351.75 cw(c16558.15,10351.75) 16555.55,10356.02 ; 16553.15,10351.75 cw(c16558.15,10351.75) 16555.55,10356.02 ; 16553.15,10351.75 cw(c16558.15,10351.75) 16555.55,10356.02 ; 16553.15,10351.75 cw(c16558.15,10351.75) 16555.55,10356.02 ; 16553.15,10351.75 cw(c16558.15,10351.75) 16555.55,10356.02
  Bottom 6+gnd w5: v1(16553.15,10298.82) 16553.15,10237.2 U2.45@16554.13,10236.22 ; R66.2@17947.32,11138.18 17948.43,11138.18 17981.61,11138.18 v1(17982.46,11139.03)
D11: IC1.67 R67.2 U1.47 U2.47 | length 3725.4
  Top Layer 1 w5: U1.47@16617.13,9775.59 16617.37,9818.09 v1(16617.37,9837.68) ; v1(16643.15,10378.82) 16653.55,10378.82 16684.21,10409.48 IC1.67@16684.21,10466.06
  Unused w5: v1(16617.37,9837.68) 16618.84,9839.14 cw(c16622.37,9835.6) 16620.07,9840.04 16641.76,9851.31 cw(c16648.87,9837.68) 16643.99,9852.26 16672.31,9861.74 cw(c16680.36,9837.68) 16675.04,9862.48 16765.25,9882.02 cw(c16774.85,9837.68) 16767.65,9882.48 16829.02,9892.34 cw(c16837.84,9837.68) 16846.13,9892.43 16928.12,9879.84 ccw(c16935.11,9924.67) 16937.4,9879.35 16987.49,9881.89 ccw(c16985.24,9927.2) 16998.61,9883.85 17109.14,9918.14 ccw(c17098.03,9953.96) 17119.43,9923.16 17675.87,10311.29 cw(c17710.04,10262.58) 17693.51,10319.73 17902.31,10380.15 ccw(c17859.4,10529.09) 17937.38,10395.13 18061.88,10467.79 ccw(c17983.57,10601.98) 18118.33,10524.65 18149.88,10579.6 ccw(c18110.55,10602.23) 18154.66,10612.87 18144.91,10653.24 ccw(c18100.81,10642.59) 18144.73,10653.98 18134.52,10693.19 ccw(c18090.6,10681.8) 18133.46,10696.69 18063.26,10901.68 cw(c18141.73,10928.53) 18061.72,10906.72 17997.29,11143.07 ccw(c17982.46,11139.03) 17996.74,11144.72 v1(17982.46,11180.61)
  Layer 3 w5: v1(16617.37,9837.68) 16617.37,10149.87 ; 16631.93,10357.37 v1(16643.15,10378.82) ; 16603.9,10182.37 ccw(c16616.88,10174.13) 16606.03,10163.24 ; 16603.9,10182.37 ccw(c16616.88,10174.13) 16606.03,10163.24 ; 16603.9,10182.37 ccw(c16616.88,10174.13) 16606.03,10163.24 ; 16603.9,10182.37 ccw(c16616.88,10174.13) 16606.03,10163.24 ; 16603.9,10182.37 ccw(c16616.88,10174.13) 16606.03,10163.24 ; 16603.9,10182.37 ccw(c16616.88,10174.13) 16606.03,10163.24 ; 16603.9,10182.37 ccw(c16616.88,10174.13) 16606.03,10163.24 ; 16603.9,10182.37 ccw(c16616.88,10174.13) 16606.03,10163.24 ; 16603.9,10182.37 ccw(c16616.88,10174.13) 16606.03,10163.24 ; 16603.9,10182.37 ccw(c16616.88,10174.13) 16606.03,10163.24 ; 16603.9,10182.37 ccw(c16616.88,10174.13) 16606.03,10163.24 ; 16603.9,10182.37 ccw(c16616.88,10174.13) 16606.03,10163.24 ; 16603.9,10182.37 ccw(c16616.88,10174.13) 16606.03,10163.24 ; 16603.9,10182.37 ccw(c16616.88,10174.13) 16606.03,10163.24 ; 16603.9,10182.37 ccw(c16616.88,10174.13) 16606.03,10163.24 ; 16603.9,10182.37 ccw(c16616.88,10174.13) 16606.03,10163.24 ; 16603.9,10182.37 16616.6,10202.39 ; 16606.03,10163.24 16615.92,10153.31 ; 16615.92,10153.31 cw(c16612.37,10149.78) 16617.37,10149.87 ; 16615.92,10153.31 cw(c16612.37,10149.78) 16617.37,10149.87 ; 16615.92,10153.31 cw(c16612.37,10149.78) 16617.37,10149.87 ; 16615.92,10153.31 cw(c16612.37,10149.78) 16617.37,10149.87 ; 16615.92,10153.31 cw(c16612.37,10149.78) 16617.37,10149.87 ; 16615.92,10153.31 cw(c16612.37,10149.78) 16617.37,10149.87 ; 16615.92,10153.31 cw(c16612.37,10149.78) 16617.37,10149.87 ; 16615.92,10153.31 cw(c16612.37,10149.78) 16617.37,10149.87 ; 16615.92,10153.31 cw(c16612.37,10149.78) 16617.37,10149.87 ; 16615.92,10153.31 cw(c16612.37,10149.78) 16617.37,10149.87 ; 16615.92,10153.31 cw(c16612.37,10149.78) 16617.37,10149.87 ; 16615.92,10153.31 cw(c16612.37,10149.78) 16617.37,10149.87 ; 16615.92,10153.31 cw(c16612.37,10149.78) 16617.37,10149.87 ; 16615.92,10153.31 cw(c16612.37,10149.78) 16617.37,10149.87 ; 16615.92,10153.31 cw(c16612.37,10149.78) 16617.37,10149.87 ; 16615.92,10153.31 cw(c16612.37,10149.78) 16617.37,10149.87 ; 16616.59,10202.39 ccw(c16612.37,10205.07) 16617.37,10204.98 ; 16616.59,10202.39 ccw(c16612.37,10205.07) 16617.37,10204.98 ; 16616.59,10202.39 ccw(c16612.37,10205.07) 16617.37,10204.98 ; 16616.59,10202.39 ccw(c16612.37,10205.07) 16617.37,10204.98 ; 16616.59,10202.39 ccw(c16612.37,10205.07) 16617.37,10204.98 ; 16617.37,10204.98 16617.37,10297.78 v1(16617.88,10298.28) 16617.88,10340.27 ; 16617.88,10340.27 cw(c16622.88,10340.27) 16619.32,10343.78 ; 16617.88,10340.27 cw(c16622.88,10340.27) 16619.32,10343.78 ; 16617.88,10340.27 cw(c16622.88,10340.27) 16619.32,10343.78 ; 16617.88,10340.27 cw(c16622.88,10340.27) 16619.32,10343.78 ; 16617.88,10340.27 cw(c16622.88,10340.27) 16619.32,10343.78 ; 16617.88,10340.27 cw(c16622.88,10340.27) 16619.32,10343.78 ; 16617.88,10340.27 cw(c16622.88,10340.27) 16619.32,10343.78 ; 16617.88,10340.27 cw(c16622.88,10340.27) 16619.32,10343.78 ; 16617.88,10340.27 cw(c16622.88,10340.27) 16619.32,10343.78 ; 16617.88,10340.27 cw(c16622.88,10340.27) 16619.32,10343.78 ; 16617.88,10340.27 cw(c16622.88,10340.27) 16619.32,10343.78 ; 16617.88,10340.27 cw(c16622.88,10340.27) 16619.32,10343.78 ; 16617.88,10340.27 cw(c16622.88,10340.27) 16619.32,10343.78 ; 16617.88,10340.27 cw(c16622.88,10340.27) 16619.32,10343.78 ; 16617.88,10340.27 cw(c16622.88,10340.27) 16619.32,10343.78 ; 16617.88,10340.27 cw(c16622.88,10340.27) 16619.32,10343.78 ; 16619.32,10343.78 16629.19,10353.65 ; 16629.19,10353.65 ccw(c16618.3,10364.5) 16631.92,10357.37 ; 16629.19,10353.65 ccw(c16618.3,10364.5) 16631.92,10357.37 ; 16629.19,10353.65 ccw(c16618.3,10364.5) 16631.92,10357.37 ; 16629.19,10353.65 ccw(c16618.3,10364.5) 16631.92,10357.37 ; 16629.19,10353.65 ccw(c16618.3,10364.5) 16631.92,10357.37 ; 16629.19,10353.65 ccw(c16618.3,10364.5) 16631.92,10357.37 ; 16629.19,10353.65 ccw(c16618.3,10364.5) 16631.92,10357.37 ; 16629.19,10353.65 ccw(c16618.3,10364.5) 16631.92,10357.37 ; 16629.19,10353.65 ccw(c16618.3,10364.5) 16631.92,10357.37 ; 16629.19,10353.65 ccw(c16618.3,10364.5) 16631.92,10357.37 ; 16629.19,10353.65 ccw(c16618.3,10364.5) 16631.92,10357.37 ; 16629.19,10353.65 ccw(c16618.3,10364.5) 16631.92,10357.37 ; 16629.19,10353.65 ccw(c16618.3,10364.5) 16631.92,10357.37 ; 16629.19,10353.65 ccw(c16618.3,10364.5) 16631.92,10357.37 ; 16629.19,10353.65 ccw(c16618.3,10364.5) 16631.92,10357.37 ; 16629.19,10353.65 ccw(c16618.3,10364.5) 16631.92,10357.37
  Bottom 6+gnd w5: U2.47@16617.13,10236.22 16617.88,10236.97 v1(16617.88,10298.28) ; R67.2@17948.43,11180.61 v1(17982.46,11180.61)
D12: IC1.68 R68.2 U1.48 U2.48 | length 3532
  Top Layer 1 w5: U1.48@16648.62,9775.59 16648.87,9818.09 v1(16648.87,9837.68) ; v1(16703.15,10388.82) 16703.52,10389.19 16703.52,10465.37 IC1.68@16703.78,10465.63
  Unused w5: v1(16648.87,9837.68) 16650.61,9839.19 cw(c16653.87,9835.4) 16651.55,9839.83 16673.14,9851.25 16673.25,9851.31 cw(c16680.36,9837.68) 16677.11,9852.7 16767.33,9872.24 cw(c16774.85,9837.68) 16769.24,9872.6 16830.64,9882.48 cw(c16837.84,9837.68) 16844.77,9882.52 16926.6,9869.95 ccw(c16935.11,9924.67) 16937.91,9869.37 16988,9871.9 ccw(c16985.24,9927.2) 17001.6,9874.31 17112.11,9908.59 ccw(c17098.03,9953.96) 17125.18,9914.98 17681.58,10303.07 cw(c17710.04,10262.58) 17696.28,10310.13 17905.13,10370.55 ccw(c17859.4,10529.09) 17942.42,10386.5 18066.92,10459.15 ccw(c17983.57,10601.98) 18127.01,10519.68 18158.55,10574.61 ccw(c18110.55,10602.23) 18164.38,10615.22 18154.63,10655.59 ccw(c18100.81,10642.59) 18154.41,10656.5 18144.19,10695.75 ccw(c18090.6,10681.8) 18142.92,10699.92 18072.71,10904.95 cw(c18141.73,10928.53) 18070.66,10912.15 v1(17999.57,11220.71)
  Layer 3 w5: v1(16648.87,9837.68) 16648.87,10149.83 ; v1(16703.15,10388.82) 16649.82,10335.49 ; 16636.86,10184.32 ccw(c16648.38,10174.13) 16637.5,10163.26 ; 16636.86,10184.32 ccw(c16648.38,10174.13) 16637.5,10163.26 ; 16636.86,10184.32 ccw(c16648.38,10174.13) 16637.51,10163.26 ; 16636.86,10184.32 ccw(c16648.38,10174.13) 16637.51,10163.26 ; 16636.86,10184.32 ccw(c16648.38,10174.13) 16637.51,10163.26 ; 16636.86,10184.32 ccw(c16648.38,10174.13) 16637.51,10163.26 ; 16636.86,10184.32 16647.61,10196.48 ; 16637.51,10163.26 16647.4,10153.36 ; 16647.4,10153.36 cw(c16643.87,10149.83) 16648.87,10149.86 ; 16647.4,10153.36 cw(c16643.87,10149.83) 16648.87,10149.86 ; 16647.4,10153.36 cw(c16643.87,10149.83) 16648.87,10149.86 ; 16647.4,10153.36 cw(c16643.87,10149.83) 16648.87,10149.86 ; 16647.4,10153.36 cw(c16643.87,10149.83) 16648.87,10149.86 ; 16647.4,10153.36 cw(c16643.87,10149.83) 16648.87,10149.86 ; 16647.4,10153.36 cw(c16643.87,10149.83) 16648.87,10149.86 ; 16647.4,10153.36 cw(c16643.87,10149.83) 16648.87,10149.86 ; 16647.4,10153.36 cw(c16643.87,10149.83) 16648.87,10149.86 ; 16647.4,10153.36 cw(c16643.87,10149.83) 16648.87,10149.86 ; 16647.4,10153.36 cw(c16643.87,10149.83) 16648.87,10149.86 ; 16647.4,10153.36 cw(c16643.87,10149.83) 16648.87,10149.86 ; 16647.4,10153.36 cw(c16643.87,10149.83) 16648.87,10149.86 ; 16647.4,10153.36 cw(c16643.87,10149.83) 16648.87,10149.86 ; 16647.4,10153.36 cw(c16643.87,10149.83) 16648.87,10149.86 ; 16647.4,10153.36 cw(c16643.87,10149.83) 16648.87,10149.86 ; 16647.61,10196.48 ccw(c16643.87,10199.79) 16648.87,10199.7 ; 16647.61,10196.48 ccw(c16643.87,10199.79) 16648.87,10199.7 ; 16647.61,10196.48 ccw(c16643.87,10199.79) 16648.87,10199.7 ; 16647.61,10196.48 ccw(c16643.87,10199.79) 16648.87,10199.7 ; 16647.61,10196.48 ccw(c16643.87,10199.79) 16648.87,10199.7 ; 16647.61,10196.48 ccw(c16643.87,10199.79) 16648.87,10199.7 ; 16647.61,10196.48 ccw(c16643.87,10199.79) 16648.87,10199.7 ; 16647.61,10196.48 ccw(c16643.87,10199.79) 16648.87,10199.7 ; 16647.61,10196.48 ccw(c16643.87,10199.79) 16648.87,10199.7 ; 16647.61,10196.48 ccw(c16643.87,10199.79) 16648.87,10199.7 ; 16647.61,10196.48 ccw(c16643.87,10199.79) 16648.87,10199.7 ; 16647.61,10196.48 ccw(c16643.87,10199.79) 16648.87,10199.7 ; 16647.61,10196.48 ccw(c16643.87,10199.79) 16648.87,10199.7 ; 16647.61,10196.48 ccw(c16643.87,10199.79) 16648.87,10199.7 ; 16647.61,10196.48 ccw(c16643.87,10199.79) 16648.87,10199.7 ; 16647.61,10196.48 ccw(c16643.87,10199.79) 16648.87,10199.7 ; 16648.38,10331.97 cw(c16653.38,10331.97) 16649.82,10335.49 ; 16648.38,10331.97 cw(c16653.38,10331.97) 16649.82,10335.49 ; 16648.38,10331.97 cw(c16653.38,10331.97) 16649.82,10335.49 ; 16648.38,10331.97 cw(c16653.38,10331.97) 16649.82,10335.49 ; 16648.38,10331.97 cw(c16653.38,10331.97) 16649.82,10335.49 ; 16648.38,10331.97 cw(c16653.38,10331.97) 16649.82,10335.49 ; 16648.38,10331.97 cw(c16653.38,10331.97) 16649.82,10335.49 ; 16648.38,10331.97 cw(c16653.38,10331.97) 16649.82,10335.49 ; 16648.38,10331.97 cw(c16653.38,10331.97) 16649.82,10335.49 ; 16648.38,10331.97 cw(c16653.38,10331.97) 16649.82,10335.49 ; 16648.38,10331.97 cw(c16653.38,10331.97) 16649.82,10335.49 ; 16648.38,10331.97 cw(c16653.38,10331.97) 16649.82,10335.49 ; 16648.38,10331.97 cw(c16653.38,10331.97) 16649.82,10335.49 ; 16648.38,10331.97 cw(c16653.38,10331.97) 16649.82,10335.49 ; 16648.38,10331.97 cw(c16653.38,10331.97) 16649.82,10335.49 ; 16648.38,10331.97 cw(c16653.38,10331.97) 16649.82,10335.49 ; 16648.38,10331.97 16648.38,10298.31 v1(16648.63,10298.06) 16648.87,10297.82 16648.87,10199.7
  Bottom 6+gnd w5: U2.48@16648.62,10236.22 v1(16648.63,10298.06) ; R68.2@17947.32,11220.81 17948.42,11220.8 17960.69,11220.71 v1(17999.57,11220.71)
D13: IC1.77 R69.2 U1.50 U2.50 | length 3878.8
  Top Layer 1 w5: U1.50@16711.86,9775.83 16711.86,9818.09 v1(16711.86,9837.68) ; v1(16727.71,10626.89) 16761.65,10626.89 16765.47,10623.07 IC1.77@16860.91,10623.07
  Unused w5: v1(16711.86,9837.68) 16713.41,9839.16 cw(c16716.86,9835.53) 16714.54,9839.96 16736.27,9851.32 cw(c16743.36,9837.68) 16738.48,9852.25 16766.8,9861.74 cw(c16774.85,9837.68) 16770.85,9862.73 16832.23,9872.6 cw(c16837.84,9837.68) 16843.28,9872.63 16925.1,9860.07 ccw(c16935.11,9924.67) 16938.41,9859.38 16988.5,9861.91 ccw(c16985.24,9927.2) 17004.57,9864.75 17115.07,9899.04 ccw(c17098.03,9953.96) 17130.9,9906.78 17687.29,10294.87 cw(c17710.04,10262.58) 17699.06,10300.52 17907.95,10360.96 ccw(c17859.4,10529.09) 17947.46,10377.86 18071.96,10450.52 ccw(c17983.57,10601.98) 18135.65,10514.66 18167.22,10569.63 ccw(c18110.55,10602.23) 18174.1,10617.57 18164.37,10657.89 ccw(c18100.81,10642.59) 18164.08,10659.04 18153.86,10698.27 ccw(c18090.6,10681.8) 18152.39,10703.14 18082.18,10908.16 cw(c18141.73,10928.53) 18080.17,10915.44 18014.62,11223.83 ccw(c17999.57,11220.71) 18014.02,11225.96 v1(17999.57,11265.71)
  Layer 3 w5: 16700.47,10163.29 cw(c16711.37,10174.13) 16699.85,10184.31 16710.61,10196.48 ; 16700.48,10163.28 16710.4,10153.31 ; v1(16711.86,9837.68) 16711.86,10149.87 ; v1(16727.71,10626.89) 16731.7,10602.04 ; 16731.7,10602 16735.97,10574.16 ; 16735.61,10516.87 16733.52,10358.62 ; 16735.61,10516.89 16736.26,10570 ; 16710.4,10153.31 cw(c16706.86,10149.78) 16711.86,10149.87 ; 16710.4,10153.31 cw(c16706.86,10149.78) 16711.86,10149.87 ; 16710.4,10153.31 cw(c16706.86,10149.78) 16711.86,10149.87 ; 16710.4,10153.31 cw(c16706.86,10149.78) 16711.86,10149.87 ; 16710.4,10153.31 cw(c16706.86,10149.78) 16711.86,10149.87 ; 16710.4,10153.31 cw(c16706.86,10149.78) 16711.86,10149.87 ; 16710.4,10153.31 cw(c16706.86,10149.78) 16711.86,10149.87 ; 16710.4,10153.31 cw(c16706.86,10149.78) 16711.86,10149.87 ; 16710.4,10153.31 cw(c16706.86,10149.78) 16711.86,10149.87 ; 16710.4,10153.31 cw(c16706.86,10149.78) 16711.86,10149.87 ; 16710.4,10153.31 cw(c16706.86,10149.78) 16711.86,10149.87 ; 16710.4,10153.31 cw(c16706.86,10149.78) 16711.86,10149.87 ; 16710.4,10153.31 cw(c16706.86,10149.78) 16711.86,10149.87 ; 16710.4,10153.31 cw(c16706.86,10149.78) 16711.86,10149.87 ; 16710.4,10153.31 cw(c16706.86,10149.78) 16711.86,10149.87 ; 16710.4,10153.31 cw(c16706.86,10149.78) 16711.86,10149.87 ; 16710.61,10196.48 ccw(c16706.86,10199.79) 16711.86,10199.7 ; 16710.61,10196.48 ccw(c16706.86,10199.79) 16711.86,10199.7 ; 16710.61,10196.48 ccw(c16706.86,10199.79) 16711.86,10199.7 ; 16710.61,10196.48 ccw(c16706.86,10199.79) 16711.86,10199.7 ; 16710.61,10196.48 ccw(c16706.86,10199.79) 16711.86,10199.7 ; 16710.61,10196.48 ccw(c16706.86,10199.79) 16711.86,10199.7 ; 16710.61,10196.48 ccw(c16706.86,10199.79) 16711.86,10199.7 ; 16710.61,10196.48 ccw(c16706.86,10199.79) 16711.86,10199.7 ; 16710.61,10196.48 ccw(c16706.86,10199.79) 16711.86,10199.7 ; 16710.61,10196.48 ccw(c16706.86,10199.79) 16711.86,10199.7 ; 16710.61,10196.48 ccw(c16706.86,10199.79) 16711.86,10199.7 ; 16710.61,10196.48 ccw(c16706.86,10199.79) 16711.86,10199.7 ; 16710.61,10196.48 ccw(c16706.86,10199.79) 16711.86,10199.7 ; 16710.61,10196.48 ccw(c16706.86,10199.79) 16711.86,10199.7 ; 16710.61,10196.48 ccw(c16706.86,10199.79) 16711.86,10199.7 ; 16710.61,10196.48 ccw(c16706.86,10199.79) 16711.86,10199.7 ; 16711.37,10319.97 cw(c16716.37,10319.97) 16712.24,10322.78 ; 16711.37,10319.97 cw(c16716.37,10319.97) 16712.24,10322.78 ; 16711.37,10319.97 cw(c16716.37,10319.97) 16712.24,10322.78 ; 16711.37,10319.97 cw(c16716.37,10319.97) 16712.24,10322.78 ; 16711.37,10319.97 cw(c16716.37,10319.97) 16712.24,10322.78 ; 16711.37,10319.97 cw(c16716.37,10319.97) 16712.24,10322.78 ; 16711.37,10319.97 cw(c16716.37,10319.97) 16712.24,10322.78 ; 16711.37,10319.97 cw(c16716.37,10319.97) 16712.24,10322.78 ; 16711.37,10319.97 cw(c16716.37,10319.97) 16712.24,10322.78 ; 16711.37,10319.97 cw(c16716.37,10319.97) 16712.24,10322.78 ; 16711.37,10319.97 cw(c16716.37,10319.97) 16712.24,10322.78 ; 16711.37,10319.97 cw(c16716.37,10319.97) 16712.24,10322.78 ; 16711.37,10319.97 cw(c16716.37,10319.97) 16712.24,10322.78 ; 16711.37,10319.97 cw(c16716.37,10319.97) 16712.24,10322.78 ; 16711.37,10319.97 cw(c16716.37,10319.97) 16712.24,10322.78 ; 16711.37,10319.97 cw(c16716.37,10319.97) 16712.24,10322.78 ; 16711.37,10319.97 v1(16711.37,10298.31) 16711.86,10297.82 16711.86,10199.7 ; 16712.24,10322.78 16730.86,10350.17 ; 16730.86,10350.17 ccw(c16718.15,10358.82) 16733.52,10358.62 ; 16730.86,10350.17 ccw(c16718.15,10358.82) 16733.52,10358.62 ; 16730.86,10350.17 ccw(c16718.15,10358.82) 16733.52,10358.62 ; 16730.86,10350.17 ccw(c16718.15,10358.82) 16733.52,10358.62 ; 16730.86,10350.17 ccw(c16718.15,10358.82) 16733.52,10358.62 ; 16730.86,10350.17 ccw(c16718.15,10358.82) 16733.52,10358.62 ; 16730.86,10350.17 ccw(c16718.15,10358.82) 16733.52,10358.62 ; 16730.86,10350.17 ccw(c16718.15,10358.82) 16733.52,10358.62 ; 16730.86,10350.17 ccw(c16718.15,10358.82) 16733.52,10358.62 ; 16730.86,10350.17 ccw(c16718.15,10358.82) 16733.52,10358.62 ; 16730.86,10350.17 ccw(c16718.15,10358.82) 16733.52,10358.62 ; 16730.86,10350.17 ccw(c16718.15,10358.82) 16733.52,10358.62 ; 16730.86,10350.17 ccw(c16718.15,10358.82) 16733.52,10358.62 ; 16730.86,10350.17 ccw(c16718.15,10358.82) 16733.52,10358.62 ; 16730.86,10350.17 ccw(c16718.15,10358.82) 16733.52,10358.62 ; 16730.86,10350.17 ccw(c16718.15,10358.82) 16733.52,10358.62 ; 16735.97,10574.16 cw(c16710.89,10570.31) 16736.26,10570 ; 16735.97,10574.16 cw(c16710.89,10570.31) 16736.26,10570 ; 16735.97,10574.16 cw(c16710.89,10570.31) 16736.26,10570 ; 16735.97,10574.16 cw(c16710.89,10570.31) 16736.26,10570 ; 16735.97,10574.16 cw(c16710.89,10570.31) 16736.26,10570 ; 16735.97,10574.16 cw(c16710.89,10570.31) 16736.26,10570 ; 16735.97,10574.16 cw(c16710.89,10570.31) 16736.26,10570 ; 16735.97,10574.16 cw(c16710.89,10570.31) 16736.26,10570 ; 16735.97,10574.16 cw(c16710.89,10570.31) 16736.26,10570 ; 16735.97,10574.16 cw(c16710.89,10570.31) 16736.26,10570 ; 16735.97,10574.16 cw(c16710.89,10570.31) 16736.26,10570 ; 16735.97,10574.16 cw(c16710.89,10570.31) 16736.26,10570 ; 16735.97,10574.16 cw(c16710.89,10570.31) 16736.26,10570 ; 16735.97,10574.16 cw(c16710.89,10570.31) 16736.26,10570 ; 16735.97,10574.16 cw(c16710.89,10570.31) 16736.26,10570 ; 16735.97,10574.16 cw(c16710.89,10570.31) 16736.26,10570
  Bottom 6+gnd w5: U2.50@16711.61,10236.22 v1@16711.61,10298.06 ; R69.2@17947.32,11262.13 17993.08,11262.13 17996.66,11265.71 v1(17999.57,11265.71)
D14: IC1.78 R70.2 U1.51 U2.51 | length 3508.4
  Top Layer 1 w5: U1.51@16743.36,9775.83 v1(16743.36,9837.68) ; v1(16767.21,10643.47) 16767.57,10643.11 16834.37,10643.11 16834.37,10643.46 IC1.78@16860.75,10642.6
  Unused w5: v1(16743.36,9837.68) 16744.91,9839.16 cw(c16748.36,9835.53) 16746.04,9839.96 16767.76,9851.31 cw(c16774.85,9837.68) 16772.47,9852.87 16833.82,9862.73 cw(c16837.84,9837.68) 16841.77,9862.74 16923.61,9850.18 ccw(c16935.11,9924.67) 16938.92,9849.39 16989.04,9851.93 ccw(c16985.24,9927.2) 17007.53,9855.2 17118.03,9889.49 ccw(c17098.03,9953.96) 17136.62,9898.57 17693.01,10286.67 cw(c17710.04,10262.58) 17701.84,10290.92 17910.77,10351.36 ccw(c17859.4,10529.09) 17952.5,10369.22 18077,10441.88 ccw(c17983.57,10601.98) 18144.33,10509.68 18175.89,10564.65 ccw(c18110.55,10602.23) 18183.82,10619.91 18174.09,10660.23 ccw(c18100.81,10642.59) 18173.76,10661.54 18163.54,10700.79 ccw(c18090.6,10681.8) 18161.87,10706.33 18091.65,10911.38 cw(c18141.73,10928.53) 18089.95,10917.52 18024.4,11225.93 ccw(c17999.57,11220.71) 18024.31,11226.35 18014.56,11269.13 ccw(c17999.57,11265.71) 18013.38,11272.46 v1(17999.57,11300.71)
  Layer 3 w5: v1(16743.36,9837.68) 16743.36,10149.87 ccw(c16738.36,10149.78) 16741.9,10153.31 16731.97,10163.28 cw(c16742.87,10174.13) 16731.34,10184.31 16742.1,10196.48 ccw(c16738.36,10199.79) 16743.36,10199.7 v1(16743.36,10294.41) 16743.36,10315.33 cw(c16748.36,10315.33) 16743.52,10316.61 16752.33,10349.72 ccw(c16718.15,10358.82) 16753.46,10356.77 16769.03,10625.55 16769.03,10625.6 ccw(c16764.03,10625.81) 16769,10626.34 v1(16767.21,10643.47)
  Bottom 6+gnd w5: U2.51@16743.11,10236.22 16743.36,10236.47 v1(16743.36,10294.41) ; R70.2@17950.25,11300.71 v1(17999.57,11300.71)
D15: IC1.79 R71.2 U1.53 U2.53 | length 3643.4
  Top Layer 1 w5: v1(16796.99,10685.43) 16796.99,10684.05 16818.44,10662.59 16860.76,10662.59 IC1.79@16860.91,10662.44 ; U1.53@16806.1,9775.59 16806.35,9818.09 v1(16806.35,9837.68)
  Unused w5: v1(16806.35,9837.68) 16807.81,9839.14 cw(c16811.35,9835.6) 16809.04,9840.04 16830.73,9851.31 cw(c16837.84,9837.68) 16840.25,9852.86 16922.13,9840.29 ccw(c16935.11,9924.67) 16939.4,9839.4 16989.55,9841.94 ccw(c16985.24,9927.2) 17010.48,9845.65 17121,9879.94 ccw(c17098.03,9953.96) 17142.34,9890.37 17698.73,10278.46 cw(c17710.04,10262.58) 17704.62,10281.31 17913.6,10341.77 ccw(c17859.4,10529.09) 17957.54,10360.59 18082.04,10433.24 ccw(c17983.57,10601.98) 18153,10504.7 18184.56,10559.67 ccw(c18110.55,10602.23) 18193.54,10622.26 18183.81,10662.58 ccw(c18100.81,10642.59) 18183.44,10664.05 18173.22,10703.31 ccw(c18090.6,10681.8) 18171.37,10709.46 18101.11,10914.62 cw(c18141.73,10928.53) 18099.73,10919.6 18034.17,11228.06 ccw(c17999.57,11220.71) 18034.06,11228.57 18024.31,11271.35 ccw(c17999.57,11265.71) 18023.88,11272.96 18014.3,11305.1 ccw(c17999.57,11300.71) 18014.02,11305.96 v1(17999.57,11345.71)
  Layer 3 w5: v1(16796.99,10685.43) 16805.85,10499.02 ; v1(16806.35,9837.68) 16806.35,10149.87 ; 16804.89,10153.31 cw(c16801.35,10149.78) 16806.35,10149.87 ; 16804.89,10153.31 cw(c16801.35,10149.78) 16806.35,10149.87 ; 16804.89,10153.31 cw(c16801.35,10149.78) 16806.35,10149.87 ; 16804.89,10153.31 cw(c16801.35,10149.78) 16806.35,10149.87 ; 16804.89,10153.31 cw(c16801.35,10149.78) 16806.35,10149.87 ; 16804.89,10153.31 cw(c16801.35,10149.78) 16806.35,10149.87 ; 16804.89,10153.31 cw(c16801.35,10149.78) 16806.35,10149.87 ; 16804.89,10153.31 cw(c16801.35,10149.78) 16806.35,10149.87 ; 16804.89,10153.31 cw(c16801.35,10149.78) 16806.35,10149.87 ; 16804.89,10153.31 cw(c16801.35,10149.78) 16806.35,10149.87 ; 16804.89,10153.31 cw(c16801.35,10149.78) 16806.35,10149.87 ; 16804.89,10153.31 cw(c16801.35,10149.78) 16806.35,10149.87 ; 16804.89,10153.31 cw(c16801.35,10149.78) 16806.35,10149.87 ; 16804.89,10153.31 cw(c16801.35,10149.78) 16806.35,10149.87 ; 16804.89,10153.31 cw(c16801.35,10149.78) 16806.35,10149.87 ; 16804.89,10153.31 cw(c16801.35,10149.78) 16806.35,10149.87 ; 16804.89,10153.31 16794.96,10163.28 cw(c16805.86,10174.13) 16794.33,10184.31 16805.09,10196.48 ; 16805.09,10196.48 ccw(c16801.35,10199.79) 16806.35,10199.7 ; 16805.09,10196.48 ccw(c16801.35,10199.79) 16806.35,10199.7 ; 16805.09,10196.48 ccw(c16801.35,10199.79) 16806.35,10199.7 ; 16805.09,10196.48 ccw(c16801.35,10199.79) 16806.35,10199.7 ; 16805.09,10196.48 ccw(c16801.35,10199.79) 16806.35,10199.7 ; 16805.09,10196.48 ccw(c16801.35,10199.79) 16806.35,10199.7 ; 16805.09,10196.48 ccw(c16801.35,10199.79) 16806.35,10199.7 ; 16805.09,10196.48 ccw(c16801.35,10199.79) 16806.35,10199.7 ; 16805.09,10196.48 ccw(c16801.35,10199.79) 16806.35,10199.7 ; 16805.09,10196.48 ccw(c16801.35,10199.79) 16806.35,10199.7 ; 16805.09,10196.48 ccw(c16801.35,10199.79) 16806.35,10199.7 ; 16805.09,10196.48 ccw(c16801.35,10199.79) 16806.35,10199.7 ; 16805.09,10196.48 ccw(c16801.35,10199.79) 16806.35,10199.7 ; 16805.09,10196.48 ccw(c16801.35,10199.79) 16806.35,10199.7 ; 16805.09,10196.48 ccw(c16801.35,10199.79) 16806.35,10199.7 ; 16805.09,10196.48 ccw(c16801.35,10199.79) 16806.35,10199.7 ; 16805.86,10498.88 ccw(c16800.86,10498.79) 16805.85,10499.02 ; 16805.86,10498.88 ccw(c16800.86,10498.79) 16805.85,10499.02 ; 16805.86,10498.88 ccw(c16800.86,10498.79) 16805.85,10499.02 ; 16805.86,10498.88 ccw(c16800.86,10498.79) 16805.85,10499.02 ; 16805.86,10498.88 ccw(c16800.86,10498.79) 16805.85,10499.02 ; 16805.86,10498.88 v1(16805.86,10298.31) 16806.35,10297.82 16806.35,10199.7
  Bottom 6+gnd w5: U2.53@16806.1,10236.22 v1@16806.1,10298.06 ; R71.2@17948.26,11345.71 v1(17999.57,11345.71)
DD0: IC2.85 U3.2 U4.2 | length 1485.8
  Top Layer 1 w5: v1@15480.01,10776.36 IC2.85@15552.61,10776.36 ; v1@15497.8,10170.19 U3.2@15497.8,10232.03
  Layer 3 w5: v1(15479.93,10776.28) 15484.91,10798.95 cw(c15499.93,10795.65) 15512.02,10805.15 15620.18,10667.36 cw(c15608.09,10657.87) 15620.89,10649.35 15513.79,10488.43 ccw(c15517.95,10485.66) 15512.95,10485.66 15512.95,10196.31 ; v1(15497.56,9709.31) 15497.56,9803 15513.68,9819.12 15513.68,10145.78 ; 15512.95,10196.27 cw(c15507.95,10196.36) 15512.13,10193.61 15498.38,10172.69 ccw(c15502.56,10169.94) 15497.56,10170 v1(15497.56,10169.94) ccw(c15502.56,10169.94) 15498.61,10166.87 15512.63,10148.8 ; 15512.63,10148.8 cw(c15508.68,10145.74) 15513.68,10145.83 ; 15512.63,10148.8 cw(c15508.68,10145.74) 15513.68,10145.83 ; 15512.63,10148.8 cw(c15508.68,10145.74) 15513.68,10145.83 ; 15512.63,10148.8 cw(c15508.68,10145.74) 15513.68,10145.83 ; 15512.63,10148.8 cw(c15508.68,10145.74) 15513.68,10145.83 ; 15512.63,10148.8 cw(c15508.68,10145.74) 15513.68,10145.83 ; 15512.63,10148.8 cw(c15508.68,10145.74) 15513.68,10145.83 ; 15512.63,10148.8 cw(c15508.68,10145.74) 15513.68,10145.83 ; 15512.63,10148.8 cw(c15508.68,10145.74) 15513.68,10145.83 ; 15512.63,10148.8 cw(c15508.68,10145.74) 15513.68,10145.83 ; 15512.63,10148.8 cw(c15508.68,10145.74) 15513.68,10145.83 ; 15512.63,10148.8 cw(c15508.68,10145.74) 15513.68,10145.83 ; 15512.63,10148.8 cw(c15508.68,10145.74) 15513.68,10145.83 ; 15512.63,10148.8 cw(c15508.68,10145.74) 15513.68,10145.83 ; 15512.63,10148.8 cw(c15508.68,10145.74) 15513.68,10145.83 ; 15512.63,10148.8 cw(c15508.68,10145.74) 15513.68,10145.83
  Bottom 6+gnd w5: v1@15497.8,9709.56 U4.2@15497.8,9771.4